# EAGLE board HOST (EAGLE 6.3)
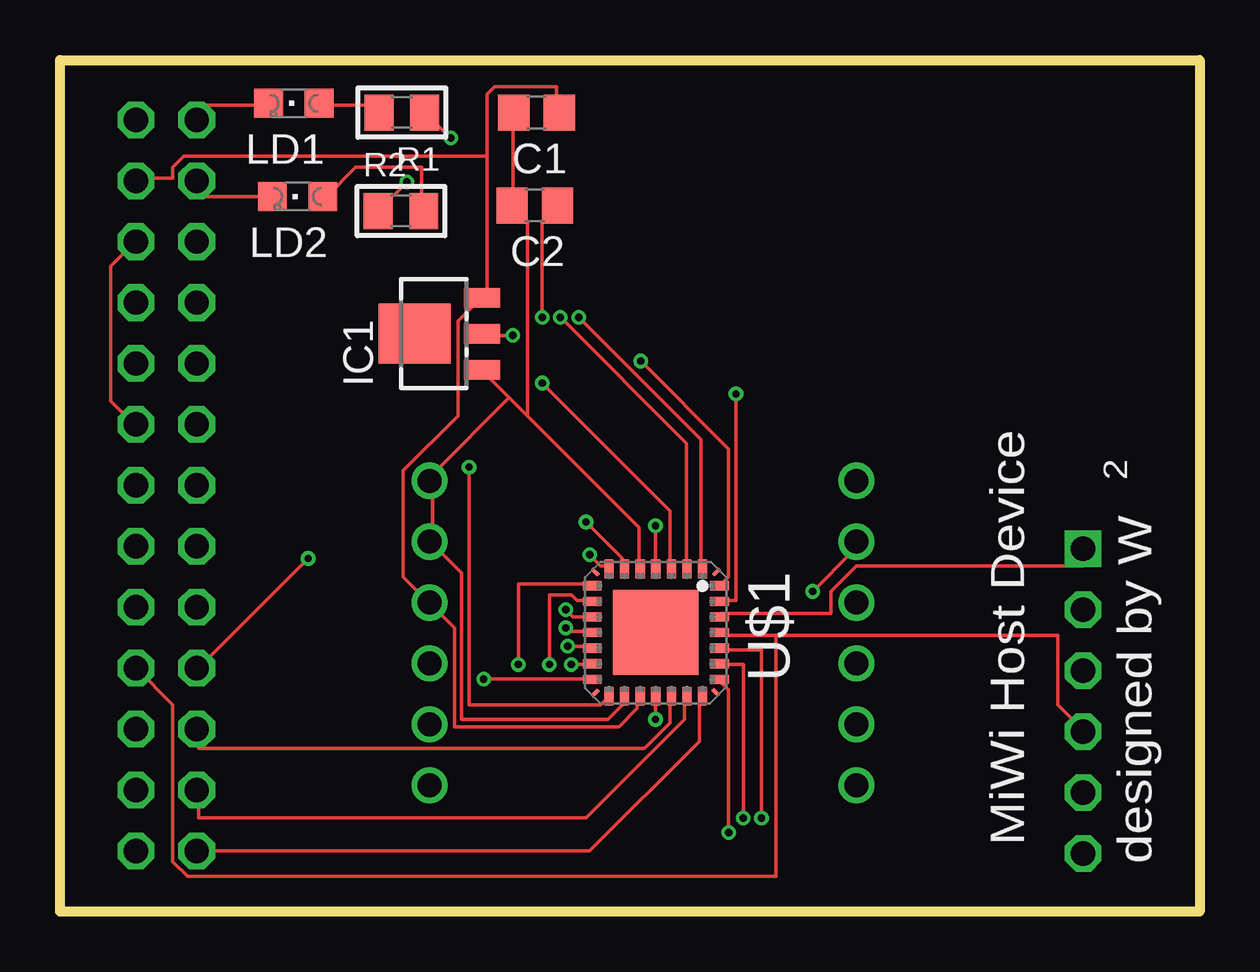
[diagram p0: board, top side]
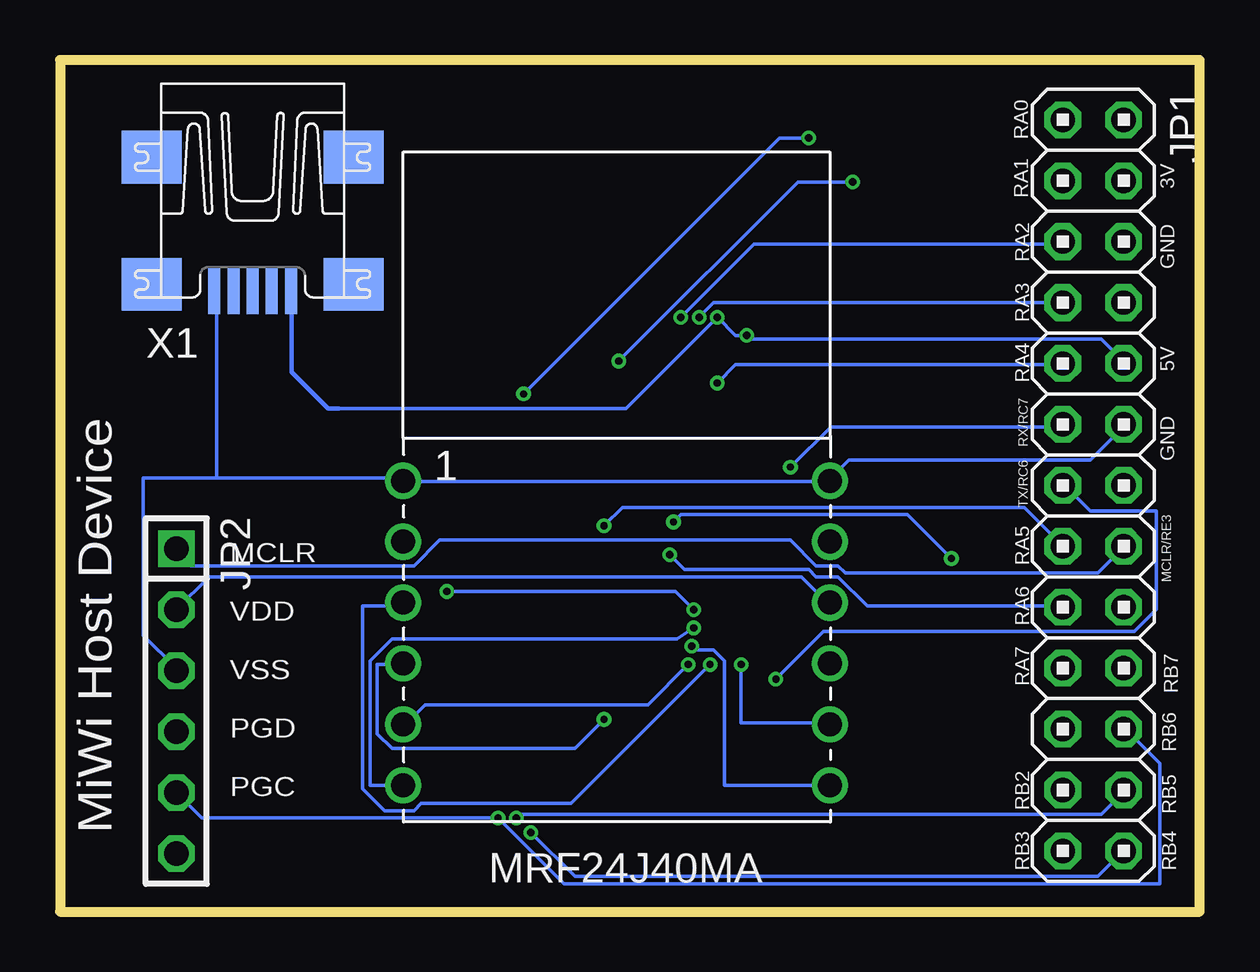
[diagram p1: board, bottom side, seen from below]

Size 47.5 x 35.5 mm. Coordinates in mm from the lower left corner, seen from the top.
Outline: 0,0 0,35.5 47.5,35.5 47.5,0 0,0
Copper layers (1*16): Top 0.035mm / dielectric 1.5mm / Bottom 0.035mm
Design rules "ITEADstudio_DRC": minimum track width 6mil, minimum drill 12mil, track to track 6mil, track to pad 6mil, pad to pad 6mil, via to via 6mil, smd to smd 0mil, copper to edge 10mil, drill to drill 10mil, minimum pad ring 10mil, minimum via ring 6mil, stop-mask expansion 2mil, vias tented up to drill 100mil, thermal gap 10mil

## Footprints (pad centres in the part's own frame; a part is rotated, then mirrored left to right if it is on the bottom)
C0805 = smd 1.3 x 1.5: 1 -0.95,0; 2 0.95,0
SOT89 = smd 0.8 x 1.5: 1 -1.5,-1.75; 2 0,-1.75; 3 1.5,-1.75 | smd 2.5 x 3: 4 0,1.05
2X13 = drill 1.016 octagon: 1 -15.24,-1.27; 2 -15.24,1.27; 3 -12.7,-1.27; 4 -12.7,1.27; 5 -10.16,-1.27; 6 -10.16,1.27; 7 -7.62,-1.27; 8 -7.62,1.27; 9 -5.08,-1.27; 10 -5.08,1.27; 11 -2.54,-1.27; 12 -2.54,1.27; 13 0,-1.27; 14 0,1.27; 15 2.54,-1.27; 16 2.54,1.27; 17 5.08,-1.27; 18 5.08,1.27; 19 7.62,-1.27; 20 7.62,1.27; 21 10.16,-1.27; 22 10.16,1.27; 23 12.7,-1.27; 24 12.7,1.27; 25 15.24,-1.27; 26 15.24,1.27
1X06 = drill 1.016 square: 1 -6.35,0 | drill 1.016 octagon: 2 -3.81,0; 3 -1.27,0; 4 1.27,0; 5 3.81,0; 6 6.35,0
CHIPLED_0805 = smd 1.2 x 1.2: A 0,-1.05; C 0,1.05
R0805 = smd 1.2 x 1.5: 1 -0.953,0; 2 0.953,0
QFN28 = smd 0.8 x 0.4: 1 -2.65,1.95; 2 -2.65,1.3; 3 -2.65,0.65; 4 -2.65,0; 5 -2.65,-0.65; 6 -2.65,-1.3; 7 -2.65,-1.95; 15 2.65,-1.95; 16 2.65,-1.3; 17 2.65,-0.65; 18 2.65,0; 19 2.65,0.65; 20 2.65,1.3; 21 2.65,1.95 | smd 0.4 x 0.8: 8 -1.95,-2.65; 9 -1.3,-2.65; 10 -0.65,-2.65; 11 0,-2.65; 12 0.65,-2.65; 13 1.3,-2.65; 14 1.95,-2.65; 22 1.95,2.65; 23 1.3,2.65; 24 0.65,2.65; 25 0,2.65; 26 -0.65,2.65; 27 -1.3,2.65; 28 -1.95,2.65 | smd 3.55 x 3.55: M 0,0 | smd 0.17 x 0.4 rotated 45: R1 -2.525,2.525 | smd 0.17 x 0.4 rotated 135: R2 -2.525,-2.525 | smd 0.17 x 0.4 rotated 225: R3 2.525,-2.525 | smd 0.17 x 0.4 rotated 315: R4 2.5,2.5
MRF24J40MA = drill 1: CS(LOW) 16.764,4.064; GND -1.016,14.224; GND1 16.764,11.684; GND2 16.764,14.224; INT -1.016,6.604; NC 16.764,6.604; RESET -1.016,11.684; SCK -1.016,1.524; SDI -1.016,4.064; SDO 16.764,1.524; VIN 16.764,9.144; WAKE -1.016,9.144
UX60A-MB-5ST = smd 2 x 0.5: 1 2.25,1.6; 2 2.25,0.8; 3 2.25,0; 4 2.25,-0.8; 5 2.25,-1.6 | smd 2.2 x 2.5: M1 -3.3,-4.2; M2 -3.3,4.2; M3 2,4.2; M4 2,-4.2

## Placement (x,y rotation side)
C1  [C0805]  19.86,33.3 180 top
C2  [C0805]  19.79,29.43 180 top
IC1  [SOT89]  15.84,24.09 90 top
JP1  [2X13]  4.43,17.77 270 bottom
JP2  [1X06]  42.65,8.77 270 bottom
LD1  [CHIPLED_0805]  9.75,33.69 90 top
LD2  [CHIPLED_0805]  9.91,29.81 90 top
R1  [R0805]  14.25,33.31 180 top
R2  [R0805]  14.21,29.21 0 top
U$1  PIC182520  [QFN28]  24.84,11.63 270 top
U$2  MRF24J40MA  [MRF24J40MA]  32.18,3.73 0 bottom
X1  MINI-USB-UX60A-MB-5ST  [UX60A-MB-5ST]  39.47,28.15 270 bottom

## Library data of the parts
C1 C2 = rcl 2
IC1 = v-reg-3
JP1 = pinhead-1
JP2 = pinhead 2
LD1 LD2 = led 2
R1 R2 = rc-master
U$1 = pic18fxx20-2
U$2 = MRF24J40MA
X1 = con-hirose 2

## Nets
N$1: U$1.12 U$2.SDO
N$2: U$1.8 U$2.CS(LOW)
N$3: U$1.10 U$2.RESET
N$4: U$1.11 U$2.SCK
N$5: U$1.13 U$2.SDI
N$6: U$1.18 U$2.INT
N$7: U$1.9 U$2.WAKE
N$9: JP1.13 U$1.14
N$10: C1.2 C2.2 IC1.1 JP1.6 JP1.12 JP2.3 U$1.5 U$1.16 U$2.GND U$2.GND1 U$2.GND2 X1.5
N$11: JP1.11 U$1.15
N$12: C2.1 IC1.2 JP1.10 X1.1
N$14: R1.1 U$1.27
N$15: R2.1 U$1.28
N$16: LD2.A R2.2
N$17: LD1.A R1.2
N$18: JP1.1 LD1.C
N$19: JP1.3 LD2.C
N$20: JP1.5 U$1.1
N$21: JP1.7 U$1.2
N$22: JP1.9 U$1.3
N$24: JP1.21 U$1.19
N$25: JP1.19 U$1.6
N$26: JP1.15 U$1.4
N$27: JP1.17 U$1.7
N$28: JP1.23 U$1.20
N$29: JP1.25 U$1.21
N$30: JP1.26 U$1.22
N$31: JP1.24 U$1.23
N$32: JP1.22 JP2.5 U$1.24
N$33: JP1.20 JP2.4 U$1.25
N$35: JP1.16 JP2.1 U$1.26
N$36: C1.1 IC1.3 JP1.4 JP2.2 U$1.17 U$2.VIN

## Tracks (layer width: path | path; a pad name or v marks a point on that pad's centre or on a via)
N$1  (via drill 0.3)
  Top 0.152: v21.16,11.06 22.08,11.06 U$1.12
  Bottom 0.152: v21.16,11.06 21.01,10.91 20.25,10.91 19.79,10.45 19.79,5.27 15.53,5.27 U$2.SDO
N$2  (via drill 0.3)
  Top 0.152: v19.11,10.3 19.11,13.65 22.08,13.65 U$1.8
  Bottom 0.152: v19.11,10.3 19.11,7.86 15.53,7.86 U$2.CS(LOW)
N$3  (via drill 0.3)
  Top 0.152: v21.09,12.58 21.39,12.28 22.16,12.28 U$1.10 | v31.38,13.35 33.05,15.02 33.05,15.33 U$2.RESET
  Bottom 0.152: v21.09,12.58 21.85,13.35 v31.38,13.35
N$4  (via drill 0.3)
  Top 0.152: v21.09,11.82 21.09,11.67 22.08,11.67 U$1.11
  Bottom 0.152: v21.09,11.82 21.77,11.37 33.66,11.37 34.58,10.45 34.58,5.27 33.2,5.27 U$2.SCK
N$5  (via drill 0.3)
  Top 0.152: v21.32,10.3 22.08,10.3 U$1.13
  Bottom 0.152: v21.32,10.3 22.99,8.62 32.29,8.62 33.05,7.86 U$2.SDI
N$6  (via drill 0.3)
  Top 0.152: v24.82,8.01 24.82,8.93 U$1.18
  Bottom 0.152: v24.82,8.01 26.04,6.79 33.66,6.79 34.27,7.4 34.27,10.3 33.2,10.3 U$2.INT
N$7  (via drill 0.3)
  Top 0.152: v20.4,10.3 20.4,13.19 21.32,13.19 21.55,12.96 22.16,12.96 U$1.9
  Bottom 0.152: v20.4,10.3 26.19,4.51 32.44,4.51 32.75,4.2 33.97,4.2 34.88,5.12 34.88,12.74 33.2,12.74 U$2.WAKE
N$9  (via drill 0.3)
  Top 0.152: v17.66,9.69 22.08,9.69 U$1.14
  Bottom 0.152: v17.66,9.69 15.68,11.67 2.72,11.67 1.81,12.58 1.81,16.7 4.55,16.7 5.62,17.77 JP1.13
N$10
  Top 0.152: 18.73,21.42 17.66,22.49 IC1.1 | 18.73,21.42 19.49,20.66 | 19.49,20.66 24.14,16.01 24.14,14.41 U$1.5 | 19.49,20.66 19.49,28.74 18.88,29.35 C2.2 18.88,29.5 18.88,33.16 C1.2 | U$1.16 23.45,8.93 23.45,8.62 22.84,8.01 16.75,8.01 16.75,14.11 15.53,15.33 U$2.GND1 15.53,15.48 15.53,17.92 U$2.GND2 15.53,18.07 15.53,18.22 18.73,21.42 | JP1.12 3.03,20.36 2.12,21.27 2.12,26.91 3.03,27.82 JP1.6
  Bottom 0.152: 40.98,18.07 40.98,25.84 X1.5 | 40.98,18.07 33.2,18.07 U$2.GND 33.05,17.92 15.53,17.92 U$2.GND2 15.37,18.07 14.61,18.83 4.55,18.83 3.18,20.2 JP1.12 | 40.98,18.07 44.02,18.07 44.02,11.52 42.65,10.15 JP2.3
N$11  (via drill 0.3)
  Top 0.152: v17.05,18.53 17.05,8.62 22.54,8.62 22.84,8.93 U$1.15
  Bottom 0.152: v17.05,18.53 15.37,20.2 5.77,20.2 JP1.11
N$12  (via drill 0.3)
  Top 0.152: v18.88,24.01 17.66,24.01 IC1.2 | v20.1,24.78 20.1,28.74 20.71,29.35 C2.1
  Bottom 0.152: JP1.10 3.18,22.95 4.1,23.86 18.73,23.86 v18.88,24.01 19.34,24.01 v20.1,24.78 23.91,20.97 35.87,20.97 | 37.78,25.84 X1.1
  Bottom 0.178: 35.87,20.97 36.33,20.97 37.85,22.49 37.85,25.88 X1.1
N$14  (via drill 0.3)
  Top 0.152: v28.18,21.58 28.18,12.96 27.57,12.96 U$1.27 | v16.29,32.24 15.22,33.31 R1.1
  Bottom 0.152: v28.18,21.58 17.51,32.24 v16.29,32.24
N$15  (via drill 0.3)
  Top 0.152: v24.21,22.95 27.87,19.29 27.87,13.96 27.57,13.65 U$1.28 | v14.46,30.41 13.39,29.35 R2.1
  Bottom 0.152: v24.21,22.95 16.75,30.41 v14.46,30.41
N$16
  Top 0.152: LD2.A 11.11,29.81 12.33,31.02 15.07,31.02 15.07,29.35 R2.2
N$17
  Top 0.152: LD1.A 10.95,33.62 13.24,33.62 13.24,33.31 R1.2
N$18
  Top 0.152: LD1.C 8.67,33.62 5.77,33.62 5.77,33.01 JP1.1
N$19
  Top 0.152: LD2.C 5.77,29.81 5.77,30.41 JP1.3
N$20  (via drill 0.3)
  Top 0.152: v21.62,24.78 26.73,19.67 26.73,14.41 U$1.1
  Bottom 0.152: v21.62,24.78 18.57,27.82 5.77,27.82 JP1.5
N$21  (via drill 0.3)
  Top 0.152: v20.86,24.78 26.12,19.52 26.12,14.41 U$1.2
  Bottom 0.152: v20.86,24.78 20.25,25.39 JP1.7
N$22  (via drill 0.3)
  Top 0.152: v20.1,22.03 25.43,16.7 25.43,14.41 U$1.3
  Bottom 0.152: v20.1,22.03 19.34,22.8 5.77,22.8 JP1.9
N$24
  Top 0.152: U$1.19 25.43,8.93 25.43,7.86 24.36,6.79 5.77,6.79 5.77,7.55 JP1.21
N$25  (via drill 0.3)
  Top 0.152: v21.93,16.24 23.45,14.72 23.45,14.41 U$1.6 | v10.34,14.72 5.77,10.15 JP1.19
  Bottom 0.152: v21.93,16.24 21.62,16.55 12.17,16.55 v10.34,14.72
N$26  (via drill 0.3)
  Top 0.152: v24.82,16.09 24.82,14.41 U$1.4
  Bottom 0.152: v24.82,16.09 24.06,16.85 7.3,16.85 5.77,15.33 JP1.15
N$27  (via drill 0.3)
  Top 0.152: v22.08,14.87 22.54,14.41 22.84,14.41 U$1.7
  Bottom 0.152: v22.08,14.87 21.47,14.26 16.29,14.26 15.98,13.96 15.07,13.96 13.85,12.74 5.77,12.74 JP1.17
N$28
  Top 0.152: U$1.20 26.04,8.93 26.04,8.01 21.93,3.9 5.77,3.9 5.77,4.96 JP1.23
N$29
  Top 0.152: JP1.25 22.08,2.53 26.65,7.1 26.65,8.93 U$1.21
N$30  (via drill 0.3)
  Top 0.152: v27.87,3.29 27.87,9.23 27.57,9.54 U$1.22
  Bottom 0.152: v27.87,3.29 26.04,1.46 4.25,1.46 3.18,2.53 JP1.26
N$31  (via drill 0.3)
  Top 0.152: v28.48,3.9 28.48,10.3 27.57,10.3 U$1.23
  Bottom 0.152: v28.48,3.9 28.33,4.05 4.1,4.05 3.18,4.96 JP1.24
N$32  (via drill 0.3)
  Top 0.152: v29.24,3.9 29.24,10.91 27.57,10.91 U$1.24
  Bottom 0.152: JP2.5 41.59,3.9 v29.24,3.9 26.5,1.15 1.66,1.15 1.66,6.18 3.03,7.55 JP1.22
N$33
  Top 0.152: 29.85,11.52 41.59,11.52 41.59,8.62 42.65,7.55 JP2.4 | 29.85,11.52 27.57,11.52 U$1.25 | 29.85,11.52 29.85,1.46 5.32,1.46 4.71,2.07 4.71,8.62 3.18,10.15 JP1.20
N$35
  Top 0.152: JP2.1 42.65,14.41 33.2,14.41 32.14,13.35 32.14,12.43 27.57,12.43 U$1.26
  Bottom 0.152: JP1.16 3.18,15.18 4.25,14.11 14.76,14.11 15.07,14.41 15.98,14.41 17.05,15.48 31.68,15.48 32.75,14.41 42.04,14.41 42.65,15.02 JP2.1
N$36
  Top 0.152: 17.81,31.48 17.81,34.07 18.12,34.38 20.71,34.38 20.71,33.31 C1.1 | 17.81,31.48 17.81,25.84 17.66,25.69 IC1.3 17.51,25.54 16.59,24.62 16.59,20.66 14.31,18.38 14.31,13.96 15.37,12.89 U$2.VIN 15.53,12.74 16.44,11.82 16.44,7.71 23.3,7.71 24.06,8.47 24.06,8.93 U$1.17 | 17.81,31.48 5.16,31.48 4.71,31.02 4.71,30.57 3.18,30.57 JP1.4
  Bottom 0.152: JP2.2 41.28,13.96 16.59,13.96 15.53,12.89 U$2.VIN

## Text on the board
tPlace: MiWi Host Device | 2 | designed by W
bPlace: RA0 | 3V | RA1 | GND | RA2 | RA3 | 5V | RA4 | GND | RX/RC7 | MiWi Host Device | TX/RC6 | MCLR/RE3 | RA5 | RA6 | RB7 | RA7 | RB6 | RB5 | RB2 | MCLR / / VDD / / VSS / / PGD / / PGC | RB4 | RB3